# Altium PCB ADuCDn.PcbDoc
Units mm, origin at the board's own origin, x right, y up, seen from the top; angles counter-clockwise.
Board outline 33.02 x 41.91 mm, 2 copper layers (TopLayer, BottomLayer); 9 components, 17 nets, 45 pads, 8 vias.
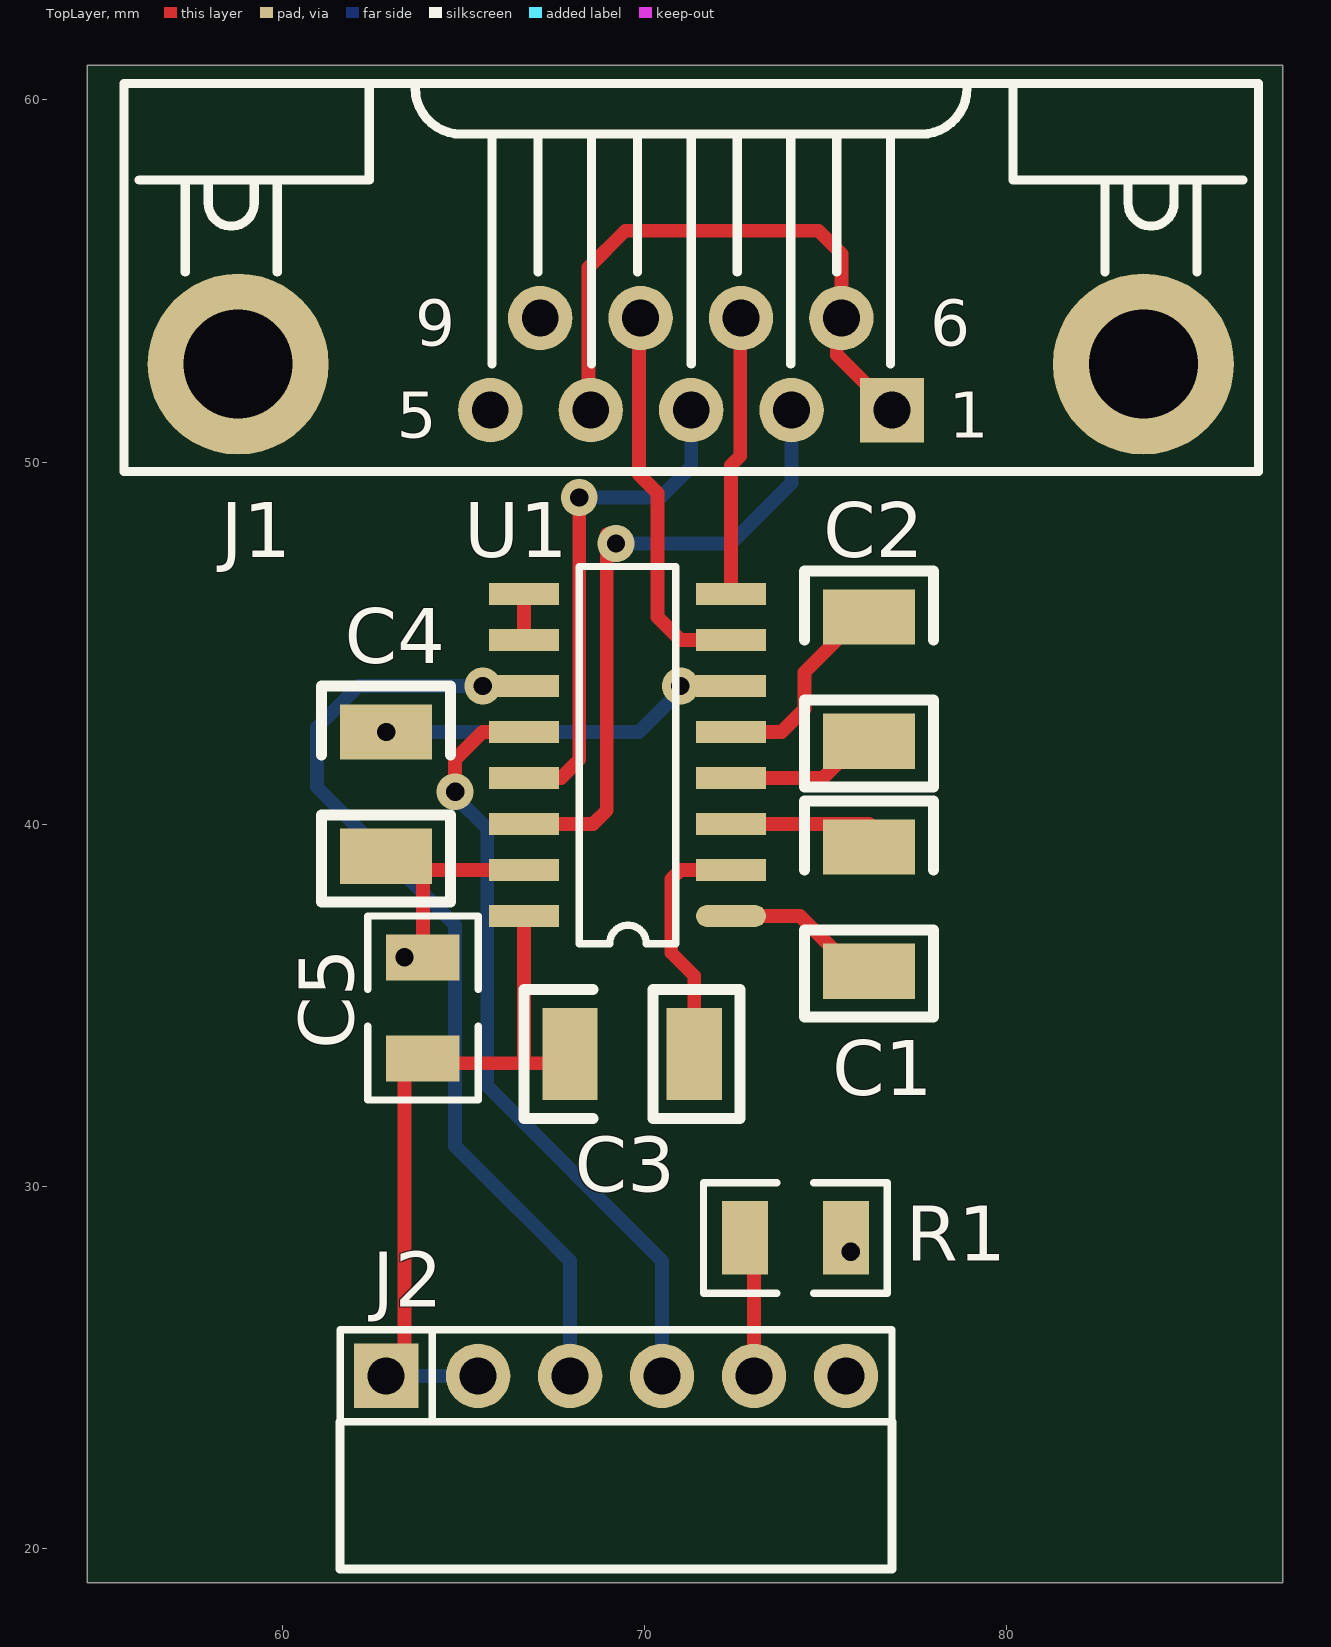
[diagram p0: TopLayer view]
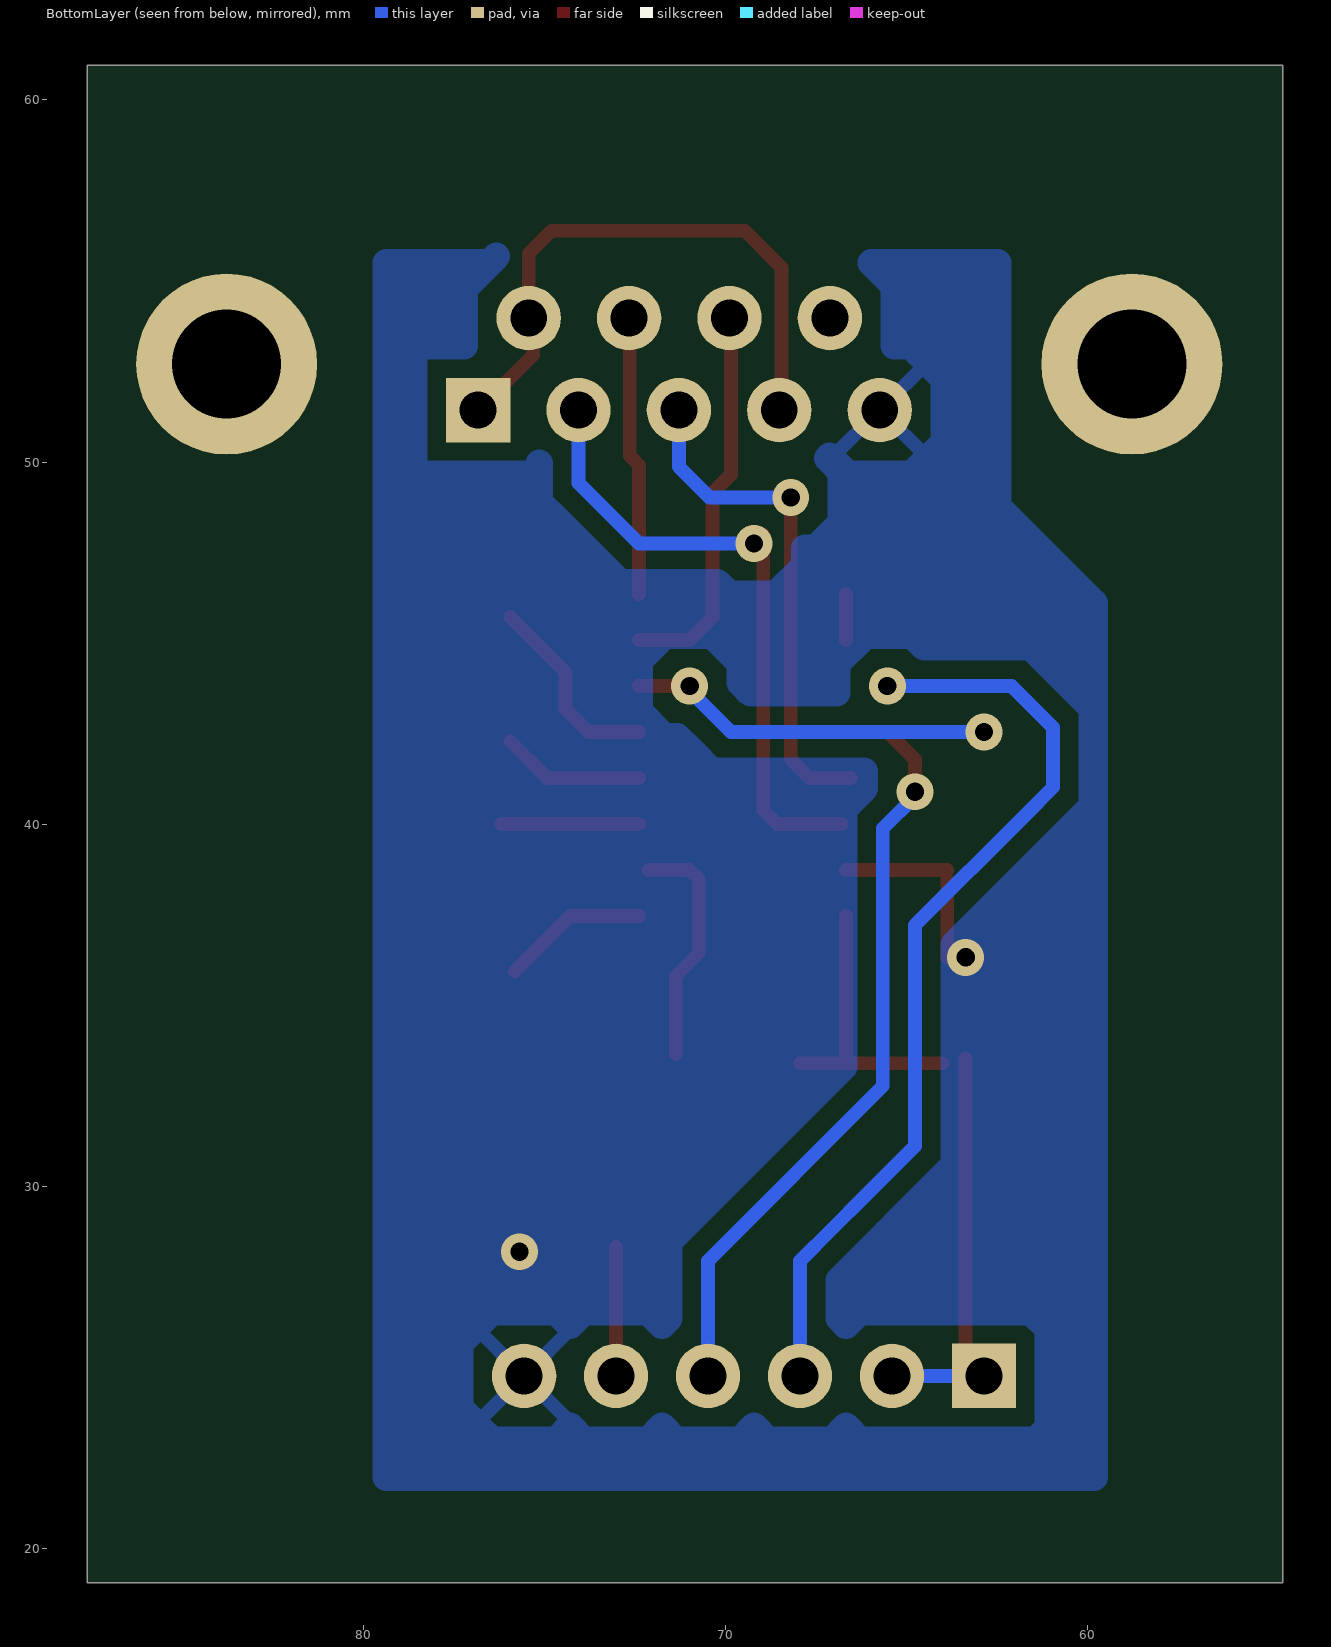
[diagram p1: BottomLayer view, seen from below]

## Layer stack, top to bottom
TopLayer: signal copper 0.0356
Dielectric: core 0.32, FR-4, Dk 4.8
BottomLayer: signal copper 0.0356

## Board outline
54.61,19.05 54.61,60.96 87.63,60.96 87.63,19.05

## Design rules (kind name [scope] priority, off if disabled: settings)
Clearance [InNet('GND')] p1: gap=0.508
Clearance Clearance_1 [All] p2: gap=0.254
FabricationTestPointUsage TestPointUsage [All] p1: valid=0 allowmultiple=FALSE
FabricationTestpoint Testpoint [All] p1: side=3 testpointundercomponent=TRUE minsize=1.016 maxsize=2.54 preferedsize=1.524 minholesize=0.508 maxholesize=1.016 preferedholesize=0.813 testpointgrid=0.025 allowsidetop=TRUE allowsidebottom=TRUE usegrid=TRUE gridtolerance=0
PolygonConnect [All] p1: connectstyle=Relief reliefconductorwidth=0.381 reliefentries=4 polygonreliefangle="45 Angle"
RoutingVias [All] p1: holewidth=0.508 width=1.016 viastyle="Through Hole" minholewidth=0.711 minwidth=1.27 maxholewidth=0.711 maxwidth=1.27
SilkscreenOverComponentPads [All] p1: minsilkscreentomaskgap=0.254
SolderMaskExpansion [All] p1: expansion=0.102
Width [All] p1: maxlimit=5.08 minlimit=0.254 preferedwidth=0.254
25 further rules are at their usual default settings.

## Components (designator, comment, footprint, x,y, rotation, side; value= is the part's Value field where it differs from the comment)
C1 "1u" CEL1210 76.2,39.37 r270 top
C2 "1u" CEL1210 76.2,45.72 r270 top
C3 "1u" CEL1210 67.945,33.655 r0 top
C4 "1u" CEL1210 62.865,42.545 r270 top
C5 "100n" 1206 63.881,33.528 r90 top
J1 "DB9" DB9SL 76.835,51.435 r0 top
J2 "WF06R" WF06R 62.865,24.765 r0 top
R1 "1k" 1206 75.565,28.575 r180 top
U1 "DS232AS" 16SOIC150 72.39,37.465 r180 top

## Footprints (in the part's own frame and the unit in brackets; to place one, negate y for a bottom-side part, rotate by r counter-clockwise, add the part's x,y. Pads: shape width x height; smd on the part's side, far side on the other; paste and mask are expansions set on the pad)
16SOIC150 [mil]
  oval 76x24 smd: 1(0,0)
  rect 76x24 smd: 2(0,-50) 3(0,-100) 4(0,-150) 5(0,-200) 6(0,-250) 7(0,-300) 8(0,-350) 9(225,-350) 10(225,-300) 11(225,-250) 12(225,-200) 13(225,-150) 14(225,-100) 15(225,-50) 16(225,0)
  silkscreen extent 60,-380 165,30
1206 [mil]
  rect 50x80 smd: 1(0,0) 2(110,0)
  silkscreen extent -45,-60 155,60
CEL1210 [mil]
  rect 60x100 smd: 1(0,0) 2(135,0)
  silkscreen extent -50,-70 185,70
DB9SL [mil]
  rect 70x70 hole 40: 1(0,0)
  round 70 hole 40: 2(-109.17,0) 3(-218.33,0) 4(-327.5,0) 5(-436.67,0) 6(-55,100) 7(-164.17,100) 8(-273.33,100) 9(-382.5,100)
  round 196.67 hole 118.33: BO1(-710.83,50) BO2(273.33,50)
  silkscreen extent -835,-67 398,355
WF06R [mil]
  rect 70x70 hole 40: 1(0,0)
  round 70 hole 40: 2(100,0) 3(200,0) 4(300,0) 5(400,0) 6(500,0)
  silkscreen extent -50,-210 550,50

## Via types
v1: diameter 1.016, hole 0.508, TopLayer to BottomLayer, 8 vias

## Nets (pads, with @x,y where several pads share a name; then routed paths per layer and width w, separated by ;. In a path a pad name is that pad's centre, name@x,y a point inside that pad or via, vN(x,y) a via of type N, cw(c..) or ccw(c..) an arc to the next point about the centre after c; other vN are vias at no path point)
GND: C4.2 C5.2 J1.5 J2.6 R1.1 U1.15 | length 5
  TopLayer w0.381: C5.2 C4.2@63.881,38.481 ; C4.2@63.881,38.735 U1.15
  other v1: 75.692,28.194 63.373,36.322
N00002: J1.1 J1.4 J1.6 | length 16.5
  TopLayer w0.381: J1.4@68.453,51.308 68.453,55.372 69.469,56.388 74.803,56.388 75.438,55.753 J1.6 ; J1.6@75.311,53.975 75.311,52.959 J1.1@76.708,51.562
N00003: J1.8 U1.7 | length 10.8
  TopLayer w0.381: J1.8@69.85,53.975 69.85,49.657 70.358,49.149 70.358,45.72 70.993,45.085 U1.7
N00004: J1.3 U1.13 | length 14.1
  TopLayer w0.381: U1.13@66.548,41.275 67.691,41.275 68.199,41.783 68.199,48.641 v1(68.199,49.022)
  BottomLayer w0.381: v1(68.199,49.022) 70.443,49.022 71.289,49.869 J1.3
N00005: J1.7 U1.8 | length 7.9
  TopLayer w0.381: U1.8 72.39,49.911 72.644,50.165 J1.7@72.644,54.102
N00006: J1.2 U1.14 | length 17.8
  TopLayer w0.381: U1.14@66.802,40.005 68.58,40.005 68.961,40.386 68.961,48.006 v1(69.215,47.752)
  BottomLayer w0.381: v1(69.215,47.752) 72.39,47.752 74.062,49.424 J1.2
N00007: C3.2 U1.2 | length 6.6
  TopLayer w0.381: C3.2 71.374,35.814 70.739,36.449 70.739,38.481 70.993,38.735 U1.2@72.136,38.735
N00008: C4.1 U1.6 | length 10.1
  TopLayer w0.381: v1(70.993,43.815) U1.6
  BottomLayer w0.381: v1(62.865,42.545) 69.85,42.545 70.993,43.688 v1(70.993,43.815)
N00009: C1.2 U1.1 | length 4.1
  TopLayer w0.381: U1.1 74.295,37.465 C1.2@75.819,35.941
N00010: C1.1 U1.3 | length 3.8
  TopLayer w0.381: U1.3 C1.1@76.2,40.005
N00011: C2.2 U1.4 | length 4
  TopLayer w0.381: U1.4 74.93,41.275 C2.2@75.946,42.291
N00012: C2.1 U1.5 | length 5.5
  TopLayer w0.381: U1.5 73.787,42.545 74.422,43.18 74.422,44.196 C2.1@75.946,45.72
N00013: J2.3 U1.11 | length 26
  BottomLayer w0.381: v1(65.532,43.815) 62.103,43.815 60.96,42.672 60.96,41.021 61.722,40.259 64.77,37.211 64.77,31.115 66.167,29.718 67.056,28.829 67.945,27.94 J2.3@67.945,24.638
N00014: U1.9 U1.10 | length 1.3
  TopLayer w0.381: U1.10 U1.9
N00015: J2.4 U1.12 | length 21.6
  TopLayer w0.381: v1(64.77,40.894) 64.77,41.783 65.532,42.545 U1.12
  BottomLayer w0.381: v1(64.77,40.894) 64.77,40.767 65.659,39.878 65.659,32.766 70.485,27.94 J2.4
N00016: J2.5 R1.2 | length 3.6
  TopLayer w0.381: J2.5 R1.2@73.025,28.321
VCC: C3.1 C5.1 J2.1 J2.2 U1.16 | length 18.9
  TopLayer w0.381: J2.1@63.373,24.765 C5.1@63.373,33.528 ; C5.1@64.008,33.401 C3.1@67.945,33.401 ; 66.675,33.528 U1.16
  BottomLayer w0.381: J2.1@63.119,24.765 J2.2
pads on no net: J1.9 J1.BO1 J1.BO2

## Polygon pours and split planes (outlines as drawn)
GND on BottomLayer "BottomLayer-GND" (hatched 45Degree grid 0.635 track 0.762, remove dead copper, pour order 1000): 62.484,55.499 79.375,55.499 79.375,21.971 59.817,21.971 59.817,46.101 62.484,48.768

## Silkscreen, mask and mechanical layers (free items; w line width, h text height)
Mechanical1:
  the board outline again, w0.254

## Text inside footprints (layer, text, board x,y; h text height)
J1: TopOverlay "9" at 63.669,53.213 h1.27; TopOverlay "5" at 63.161,50.673 h1.27; TopOverlay "1" at 78.401,50.673 h1.27; TopOverlay "6" at 77.893,53.213 h1.27